# EAGLE board BSPDTesting (EAGLE 7.6.0)
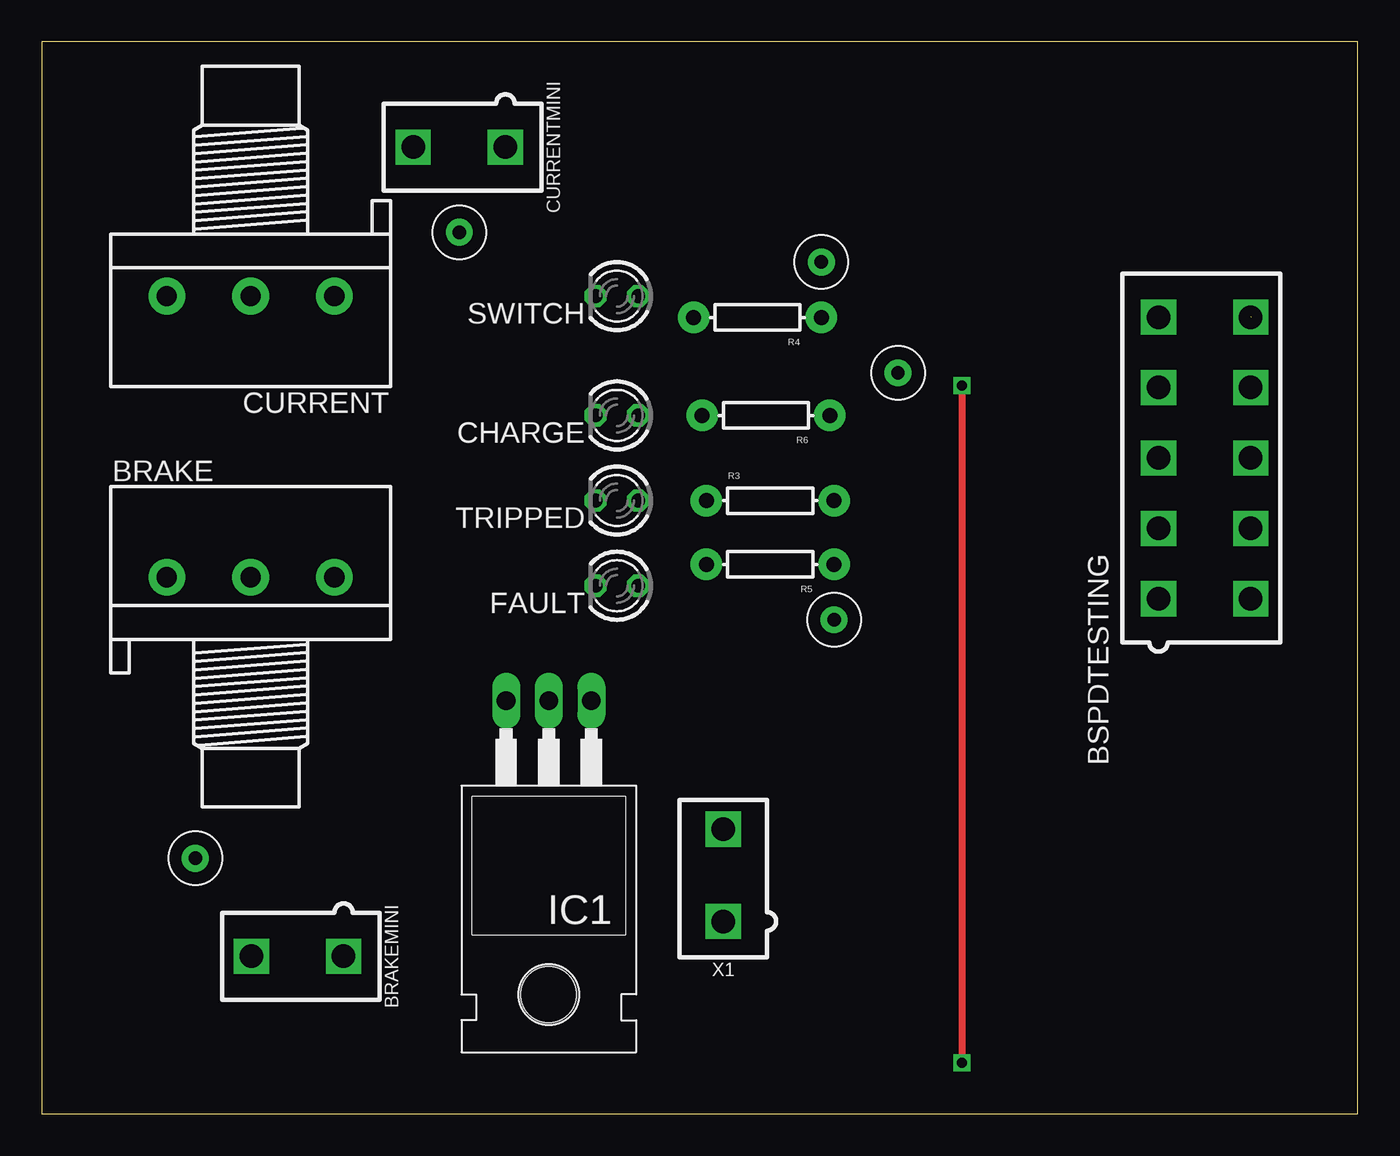
[diagram p0: board, top side]
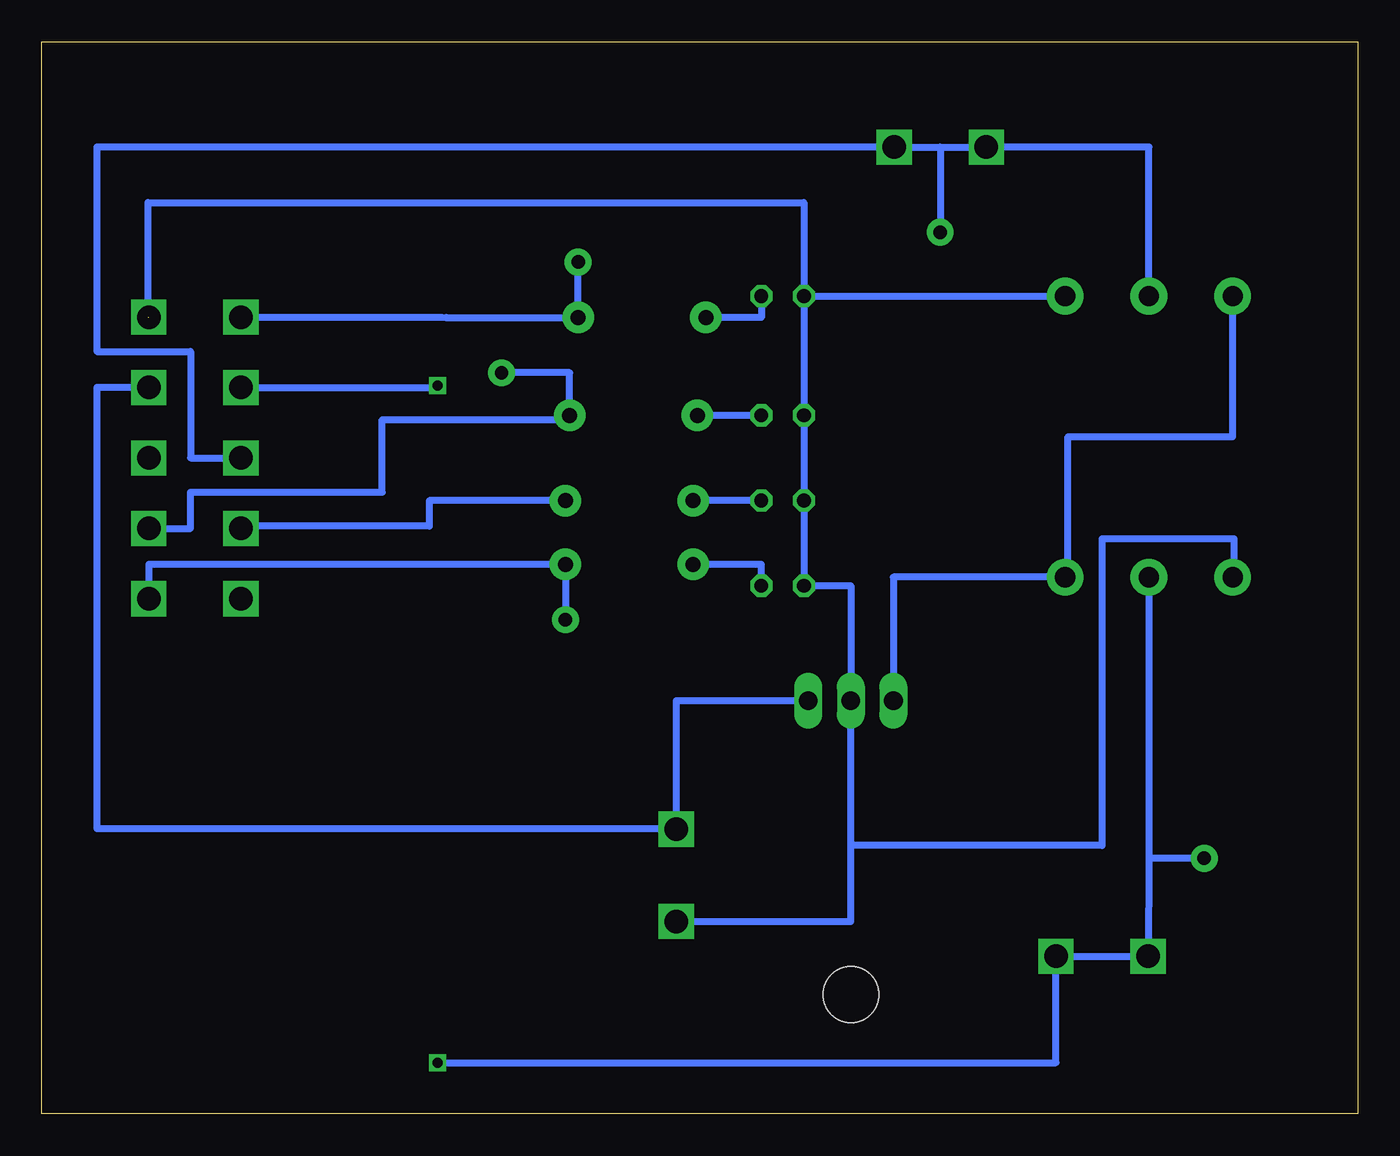
[diagram p1: board, bottom side, seen from below]

Size 78.47 x 63.93 mm. Coordinates in mm from the lower left corner, seen from the top.
Outline: 0,0 78.47,0 78.47,63.93 0,63.93 0,0
Copper layers (1*16): Top 0.035mm / dielectric 1.5mm / Bottom 0.035mm
Design rules "default": minimum track width 10mil, minimum drill 24mil, track to track 8mil, track to pad 8mil, pad to pad 8mil, via to via 8mil, smd to smd 8mil, copper to edge 40mil, drill to drill 8mil, minimum pad ring 10mil, minimum via ring 8mil, stop-mask expansion 4mil, vias tented up to drill 0mil, thermal gap 10mil

## Footprints (pad centres in the part's own frame; a part is rotated, then mirrored left to right if it is on the bottom)
3RP/1610N = drill 1.2 pad 2.184: 1 -5,0; 2 0,0; 3 5,0
MINIFIT_5566-2 = drill 1.4 square: 1 0,-2.75; 2 0,2.75
MINIFIT_5566-10 = drill 1.4 square: 1 8.4,-2.75; 2 4.2,-2.75; 3 0,-2.75; 4 -4.2,-2.75; 5 -8.4,-2.75; 6 8.4,2.75; 7 4.2,2.75; 8 0,2.75; 9 -4.2,2.75; 10 -8.4,2.75
LED-3MM = drill 0.813 octagon: A -1.27,0; K 1.27,0
TO-220-H = drill 1.118 long: 1 -2.54,-6.35; 2 0,-6.35; 3 2.54,-6.35 | hole 3.302: 0,11.176
AXIAL-0.3 = drill 0.9 pad 1.88: P$1 -3.81,0; P$2 3.81,0
TEST_POINT_COMPACT_THM = drill 0.8 pad 1.6: P$1 0,0

## Placement (x,y rotation side)
BRAKE  [3RP/1610N]  12.45,32 0 top
BRAKEMINI  MINIFIT_5566-2  [MINIFIT_5566-2]  15.24,9.4 90 top
BSPDTESTING  MINIFIT_5566-10  [MINIFIT_5566-10]  69.34,39.12 270 top
CHARGE  [LED-3MM]  34.29,41.66 180 top
CURRENT  [3RP/1610N]  12.45,48.77 180 top
CURRENTMINI  MINIFIT_5566-2  [MINIFIT_5566-2]  24.89,57.66 90 top
FAULT  [LED-3MM]  34.29,31.5 180 top
IC1  [TO-220-H]  30.23,18.29 180 top
R3  [AXIAL-0.3]  43.43,36.58 0 top
R4  [AXIAL-0.3]  42.67,47.5 180 top
R5  [AXIAL-0.3]  43.43,32.77 180 top
R6  [AXIAL-0.3]  43.18,41.66 180 top
SWITCH  [LED-3MM]  34.29,48.77 180 top
TRIPPED  [LED-3MM]  34.29,36.58 180 top
U$1  TEST_POINT_COMPACT_THM  [TEST_POINT_COMPACT_THM]  9.14,15.24 0 top
U$2  TEST_POINT_COMPACT_THM  [TEST_POINT_COMPACT_THM]  24.89,52.58 0 top
U$3  TEST_POINT_COMPACT_THM  [TEST_POINT_COMPACT_THM]  46.48,50.8 0 top
U$4  TEST_POINT_COMPACT_THM  [TEST_POINT_COMPACT_THM]  47.24,29.46 0 top
U$5  TEST_POINT_COMPACT_THM  [TEST_POINT_COMPACT_THM]  51.05,44.2 0 top
X1  MINIFIT_5566-2  [MINIFIT_5566-2]  40.64,14.22 0 top

## Library data of the parts
BRAKE CHARGE CURRENT FAULT IC1 R3-R6 SWITCH TRIPPED U$1-U$5 = HyTechDevices
BRAKEMINI CURRENTMINI X1 = HyTechDevices; OC_FARNELL: 1822072; OC_NEWARK: unknown
BSPDTESTING = HyTechDevices; OC_FARNELL: unknown; OC_NEWARK: unknown

## Nets
+12V: BSPDTESTING.9 IC1.1 X1.2
GND: BRAKE.1 BSPDTESTING.10 CHARGE.K CURRENT.1 FAULT.K IC1.2 SWITCH.K TRIPPED.K X1.1
N$1: BSPDTESTING.1
N$2: BSPDTESTING.5 R4.P$1 U$3.P$1
N$3: R4.P$2 SWITCH.A
N$4: BSPDTESTING.6 R5.P$1 U$4.P$1
N$5: FAULT.A R5.P$2
N$6: BSPDTESTING.7 R6.P$1 U$5.P$1
N$7: CHARGE.A R6.P$2
N$8: BSPDTESTING.2 R3.P$2
N$9: R3.P$1 TRIPPED.A
N$11: BRAKE.2 BRAKEMINI.1 BRAKEMINI.2 BSPDTESTING.4 U$1.P$1
N$12: BSPDTESTING.3 CURRENT.2 CURRENTMINI.1 CURRENTMINI.2 U$2.P$1
N$15: BRAKE.3 CURRENT.3 IC1.3

## Tracks (layer width: path | path; a pad name or v marks a point on that pad's centre or on a via)
+12V
  Bottom 0.406: IC1.1 40.64,24.64 40.64,17.02 | BSPDTESTING.9 75.18,43.32 75.18,17.02 40.64,17.02 | 40.64,17.02 X1.2
GND  (1 unrouted)
  Bottom 0.406: 72.14,47.52 72.14,54.36 33.02,54.36 SWITCH.K | SWITCH.K CHARGE.K TRIPPED.K FAULT.K 30.23,31.5 IC1.2 30.23,16 | X1.1 30.23,11.47 30.23,16 | SWITCH.K CURRENT.1 | BRAKE.1 7.37,32 7.37,34.29 15.24,34.29 15.24,16 30.23,16
N$2
  Bottom 0.406: BSPDTESTING.5 54.61,47.52 54.36,47.5 R4.P$1 U$3.P$1
N$3
  Bottom 0.406: SWITCH.A 35.56,47.5 R4.P$2
N$4
  Bottom 0.406: U$4.P$1 R5.P$1 72.09,32.77 BSPDTESTING.6
N$5
  Bottom 0.406: FAULT.A 35.56,32.77 R5.P$2
N$6
  Bottom 0.406: BSPDTESTING.7 69.6,34.92 69.6,37.08 58.17,37.08 58.17,41.4 46.99,41.4 R6.P$1 46.99,44.2 U$5.P$1
N$7
  Bottom 0.406: CHARGE.A R6.P$2
N$8
  Bottom 0.406: R3.P$2 55.37,36.58 55.37,35.05 66.59,35.05 BSPDTESTING.2
N$9
  Bottom 0.406: TRIPPED.A R3.P$1
N$11  (via drill 0.6)
  Top 0.406: v54.86,43.43 v54.86,3.05
  Bottom 0.406: BRAKE.2 12.45,15.24 | 12.45,15.24 BRAKEMINI.2 BRAKEMINI.1 17.99,3.05 v54.86,3.05 | U$1.P$1 12.45,15.24 | BSPDTESTING.4 54.86,43.32 v54.86,43.43
N$12
  Bottom 0.406: CURRENT.2 12.45,57.66 CURRENTMINI.2 CURRENTMINI.1 | CURRENTMINI.1 24.89,57.66 U$2.P$1 | CURRENTMINI.1 75.18,57.66 75.18,45.47 69.6,45.47 69.6,39.12 BSPDTESTING.3
N$15
  Bottom 0.406: IC1.3 27.69,32 BRAKE.3 17.27,32 17.27,40.39 7.45,40.39 CURRENT.3